# EAGLE board CT_schematic (EAGLE 7.6.0)

Size 100 x 80 mm. Coordinates in mm from the lower left corner, seen from the top.
Outline: 0,0 100,0 100,80 0,80 0,0
Copper layers (1*16): Top 0.035mm / dielectric 1.5mm / Bottom 0.035mm
Design rules "default": minimum track width 10mil, minimum drill 24mil, track to track 8mil, track to pad 8mil, pad to pad 8mil, via to via 8mil, smd to smd 8mil, copper to edge 40mil, drill to drill 8mil, minimum pad ring 10mil, minimum via ring 8mil, stop-mask expansion 4mil, vias tented up to drill 0mil, thermal gap 10mil

## Footprints (pad centres in the part's own frame; a part is rotated, then mirrored left to right if it is on the bottom)
C0603 = smd 0.8 x 0.8: 1 -0.762,0; 2 0.762,0
C0402 = smd 0.5 x 0.5: 1 -0.508,0; 2 0.508,0
C0805 = smd 1.2 x 1.3: 1 -1.016,0; 2 1.016,0
C1210 = smd 1.2 x 2.5: 1 -1.524,0; 2 1.524,0
C1206 = smd 1.3 x 1.6: 1 -1.524,0; 2 1.524,0
L0603 = smd 0.8 x 0.8: 1 -0.762,0; 2 0.762,0
L1210 = smd 1.2 x 2.5: 1 -1.524,0; 2 1.524,0
DR1040 = smd 1.6 x 3.2: 1 -4.458,0; 2 4.458,0
R0603 = smd 0.8 x 0.8: 1 -0.762,0; 2 0.762,0
LQFP64 = smd 0.3 x 1.2: 1 -3.75,-5.75; 2 -3.25,-5.75; 3 -2.75,-5.75; 4 -2.25,-5.75; 5 -1.75,-5.75; 6 -1.25,-5.75; 7 -0.75,-5.75; 8 -0.25,-5.75; 9 0.25,-5.75; 10 0.75,-5.75; 11 1.25,-5.75; 12 1.75,-5.75; 13 2.25,-5.75; 14 2.75,-5.75; 15 3.25,-5.75; 16 3.75,-5.75; 33 3.75,5.75; 34 3.25,5.75; 35 2.75,5.75; 36 2.25,5.75; 37 1.75,5.75; 38 1.25,5.75; 39 0.75,5.75; 40 0.25,5.75; 41 -0.25,5.75; 42 -0.75,5.75; 43 -1.25,5.75; 44 -1.75,5.75; 45 -2.25,5.75; 46 -2.75,5.75; 47 -3.25,5.75; 48 -3.75,5.75 | smd 1.2 x 0.3: 17 5.75,-3.75; 18 5.75,-3.25; 19 5.75,-2.75; 20 5.75,-2.25; 21 5.75,-1.75; 22 5.75,-1.25; 23 5.75,-0.75; 24 5.75,-0.25; 25 5.75,0.25; 26 5.75,0.75; 27 5.75,1.25; 28 5.75,1.75; 29 5.75,2.25; 30 5.75,2.75; 31 5.75,3.25; 32 5.75,3.75; 49 -5.75,3.75; 50 -5.75,3.25; 51 -5.75,2.75; 52 -5.75,2.25; 53 -5.75,1.75; 54 -5.75,1.25; 55 -5.75,0.75; 56 -5.75,0.25; 57 -5.75,-0.25; 58 -5.75,-0.75; 59 -5.75,-1.25; 60 -5.75,-1.75; 61 -5.75,-2.25; 62 -5.75,-2.75; 63 -5.75,-3.25; 64 -5.75,-3.75
LGA-16 = smd 1.5 x 0.4: 1 -2.1,0.975; 2 -2.1,0.325; 3 -2.1,-0.325; 4 -2.1,-0.975; 9 2.1,-0.975; 10 2.1,-0.325; 11 2.1,0.325; 12 2.1,0.975 | smd 0.4 x 1.5: 5 -0.975,-2.1; 6 -0.325,-2.1; 7 0.325,-2.1; 8 0.975,-2.1; 13 0.975,2.1; 14 0.325,2.1; 15 -0.325,2.1; 16 -0.975,2.1
SSOP-16 = smd 1.981 x 0.356: 1 -2.464,2.223; 2 -2.464,1.587; 3 -2.464,0.953; 4 -2.464,0.318; 5 -2.464,-0.318; 6 -2.464,-0.953; 7 -2.464,-1.587; 8 -2.464,-2.223; 9 2.464,-2.223; 10 2.464,-1.587; 11 2.464,-0.953; 12 2.464,-0.318; 13 2.464,0.318; 14 2.464,0.953; 15 2.464,1.587; 16 2.464,2.223
182-009-MALE = drill 1.194 pad 1.524 octagon: 1 -5.537,10.923; 2 -2.769,10.923; 3 0,10.923; 4 2.769,10.923; 5 5.537,10.923; 6 -4.153,8.08; 7 -1.384,8.08; 8 1.384,8.08; 9 4.153,8.08 | hole 3.048: -12.446,9.501; 12.446,9.501
ASEK = smd 1.4 x 1: 1 -1.1,-0.8; 2 1.1,-0.8; 3 1.1,0.8; 4 -1.1,0.8
ASDMB-XX.XXXXMHZ-XX-XX-XXX = smd 0.65 x 0.85: 1 0.45,0.2; 2 2.05,0.2; 3 2.05,1.8; 4 0.45,1.8
TSOT-23-5 = smd 1.3 x 0.62: 1 -1.31,0.95; 2 -1.31,0; 3 -1.31,-0.95; 4 1.31,-0.95; 5 1.31,0.95
WSON-8 = smd 0.3 x 0.6: 1 -0.75,0; 2 0.05,0; 3 0.85,0; 4 1.65,0; 5 1.65,3.8; 6 0.85,3.8; 7 0.05,3.8; 8 -0.75,3.8 | smd 3 x 2.6: PAD 0.45,1.9
DFN8_2X3MC = smd 0.813 x 0.305: 1 -1.398,0.75; 2 -1.398,0.25; 3 -1.398,-0.25; 4 -1.398,-0.75; 5 1.398,-0.75; 6 1.398,-0.25; 7 1.398,0.25; 8 1.398,0.75 | smd 1.753 x 1.549: 9 0,0
JST-2-SMD = smd 1 x 4.6: 1 -1,-3.7; 2 1,-3.7 | smd 1.6 x 3.4: NC1 -3.4,1.5; NC2 3.4,1.5
FCI_10118193-0001LF = smd 0.4 x 1.35: 1 -1.3,2.675; 2 -0.65,2.675; 3 0,2.675; 4 0.65,2.675; 5 1.3,2.675 | smd 1.6 x 1.4: 6 -3.2,2.45; 7 3.2,2.45 | smd 1.9 x 1.9: 8 -1.2,0; 9 1.2,0 | hole 0.5: -3.3,0; 3.3,0
SON-6 = smd 0.55 x 0.3: 1 -0.355,0.5 | smd 0.52 x 0.3: 2 -0.37,0; 3 -0.37,-0.5; 4 0.37,-0.5; 5 0.37,0; 6 0.37,0.5
SW_4-1437565-2 = smd 1.4 x 2.1: 1 -2.23,4.55; 2 -2.23,-4.55; 3 2.23,4.55; 4 2.23,-4.55
LGM67K-G1J2-24-Z = smd 0.8 x 1.4: A -2,0; C 0,0
NC7SZ125M5X = smd 1.3 x 0.7: 1 -1.3,0.95; 2 -1.3,0; 3 -1.3,-0.95; 4 1.3,-0.95; 5 1.3,0.95

## Placement (x,y rotation side)
C1  1e-06  [C0603]  -30.48,68.58 0 top  (outside the outline)
C2  1e-07  [C0603]  -34.29,68.58 0 top  (outside the outline)
C3  1e-07  [C0603]  -38.1,68.58 0 top  (outside the outline)
C4  1e-07  [C0603]  -41.91,68.58 0 top  (outside the outline)
C5  1e-07  [C0603]  -45.72,68.58 0 top  (outside the outline)
C6  1e-07  [C0603]  -49.53,68.58 0 top  (outside the outline)
C7  4.7e-06  [C0603]  -19.05,68.58 0 top  (outside the outline)
C8  1e-08  [C0603]  -53.34,68.58 0 top  (outside the outline)
C9  1e-06  [C0603]  -57.15,68.58 0 top  (outside the outline)
C10  1e-08  [C0402]  -34.29,73.66 0 top  (outside the outline)
C11  1e-08  [C0402]  -38.1,73.66 0 top  (outside the outline)
C12  1e-08  [C0402]  -41.91,73.66 0 top  (outside the outline)
C13  4.7e-07  [C0603]  -22.86,68.58 0 top  (outside the outline)
C14  1e-06  [C0603]  -60.96,68.58 0 top  (outside the outline)
C15  1e-06  [C0603]  -64.77,68.58 0 top  (outside the outline)
C16  2.2e-07  [C0603]  -26.67,68.58 0 top  (outside the outline)
C17  1e-06  [C0603]  -68.58,68.58 0 top  (outside the outline)
C18  1e-06  [C0603]  -72.39,68.58 0 top  (outside the outline)
C19  1e-08  [C0402]  -45.72,73.66 0 top  (outside the outline)
C20  1e-08  [C0402]  -49.53,73.66 0 top  (outside the outline)
C21  1e-05  [C0805]  -40.64,57.15 0 top  (outside the outline)
C22  1e-05  [C0805]  -45.72,57.15 0 top  (outside the outline)
C23  1e-06  [C0603]  -15.24,73.66 0 top  (outside the outline)
C24  1e-05  [C1210]  -68.58,49.53 0 top  (outside the outline)
C25  1e-07  [C0402]  -53.34,73.66 0 top  (outside the outline)
C26  1e-05  [C1206]  -22.86,58.42 0 top  (outside the outline)
C27  1e-05  [C1206]  -29.21,58.42 0 top  (outside the outline)
C28  1e-08  [C0402]  -57.15,73.66 0 top  (outside the outline)
F1  240.0  [L0603]  -19.05,73.66 0 top  (outside the outline)
I1  1e-05  [L1210]  -16.51,58.42 0 top  (outside the outline)
I2  5.2e-06  [DR1040]  -55.88,27.94 0 top  (outside the outline)
R2  1000.0  [R0603]  -22.86,73.66 0 top  (outside the outline)
R4  4700.0  [R0603]  -26.67,73.66 0 top  (outside the outline)
R5  10000.0  [R0603]  -35.56,63.5 0 top  (outside the outline)
R6  10000.0  [R0603]  -40.64,63.5 0 top  (outside the outline)
R7  10000.0  [R0603]  -45.72,63.5 0 top  (outside the outline)
R8  10000.0  [R0603]  -50.8,63.5 0 top  (outside the outline)
R9  100000.0  [R0603]  -63.5,57.15 0 top  (outside the outline)
R10  490000.0  [R0603]  -68.58,57.15 0 top  (outside the outline)
R11  1000000.0  [R0603]  -58.42,57.15 0 top  (outside the outline)
R12  100000.0  [R0603]  -15.24,63.5 0 top  (outside the outline)
R13  91000.0  [R0603]  -55.88,63.5 0 top  (outside the outline)
R14  100000.0  [R0603]  -20.32,63.5 0 top  (outside the outline)
R15  10000.0  [R0603]  -60.96,63.5 0 top  (outside the outline)
R16  10000.0  [R0603]  -66.04,63.5 0 top  (outside the outline)
R17  82000.0  [R0603]  -71.12,63.5 0 top  (outside the outline)
R18  300000.0  [R0603]  -25.4,63.5 0 top  (outside the outline)
R19  120000.0  [R0603]  -30.48,63.5 0 top  (outside the outline)
R20  2000.0  [R0603]  -30.48,73.66 0 top  (outside the outline)
R21  10000.0  [R0603]  -15.24,68.58 0 top  (outside the outline)
U1  STM32F378RCT6  [LQFP64]  -24.13,29.21 0 top  (outside the outline)
U2  l3g4200d  [LGA-16]  -49.53,49.53 0 top  (outside the outline)
U3  LTC2804CGN-1#PBF  [SSOP-16]  -44.45,40.64 0 top  (outside the outline)
U4  182-009-113R531  [182-009-MALE]  -41.91,6.35 0 top  (outside the outline)
U5  ASEK-2-32.768KHz-ECST  [ASEK]  -43.18,50.8 0 top  (outside the outline)
U6  ASDMB-25.000MHZ-EC-T  [ASDMB-XX.XXXXMHZ-XX-XX-XXX]  -16.51,1.27 0 top  (outside the outline)
U7  ltc3406es5  [TSOT-23-5]  -50.8,57.15 0 top  (outside the outline)
U8  LP2951ACSDX/NOPB  [WSON-8]  -64.77,39.37 0 top  (outside the outline)
U9  MCP73831T-2ACI/MC  [DFN8_2X3MC]  -66.04,72.39 0 top  (outside the outline)
U10  S2B-PH-SM4-TB(LF)(SN)  [JST-2-SMD]  -22.86,41.91 0 top  (outside the outline)
U11  10118193-0001LF  [FCI_10118193-0001LF]  -19.05,49.53 0 top  (outside the outline)
U12  TPS3895ADRYR  [SON-6]  -59.69,72.39 0 top  (outside the outline)
U13  4-1437565-2  [SW_4-1437565-2]  -45.72,27.94 0 top  (outside the outline)
U14  Q65110A2395  [LGM67K-G1J2-24-Z]  -57.15,49.53 0 top  (outside the outline)
U15  nc7sz125m5x  [NC7SZ125M5X]  -34.29,57.15 0 top  (outside the outline)

## Library data of the parts
C1-C28 F1 I1 I2 R2 R4-R21 U1-U15 = circuit_tree

## Nets
CLK_U1_3: U1.3 U5.3
CLK_U1_5: U1.5 U6.3
GND: C1.2 C2.2 C3.2 C4.2 C5.2 C6.2 C7.2 C8.2 C9.2 C10.2 C11.2 C12.2 C14.2 C15.2 C17.2 C18.2 C19.2 C20.2 C21.2 C22.1 C22.2 C23.2 C24.2 C25.2 C26.2 C27.2 C28.2 R2.2 R5.2 R6.2 R7.1 R7.2 R10.2 R14.2 R17.2 R19.2 R20.2 U1.12 U1.31 U1.63 U2.8 U2.9 U2.10 U2.11 U2.12 U2.13 U3.8 U4.5 U5.2 U6.2 U7.2 U8.3 U8.4 U8.PAD U9.6 U9.9 U10.2 U11.5 U11.6 U11.7 U11.8 U11.9 U12.2 U14.C U15.1 U15.3
INPUT_USBPOWER_5V: C26.1 R21.2 U9.1 U9.2 U11.1
NET_U1_7: R4.1 U1.7 U15.4
NET_U1_13: C8.1 C9.1 F1.1 U1.13 U1.17 U1.32
NET_U1_28: R6.1 U1.28
NET_U1_32: U1.32
NET_U1_33: U1.33
NET_U1_60: R5.1 U1.60
NET_U1_61: U14.A
NET_U1_62: U13.3 U13.4
NET_U2_14: C12.1 C13.1 U2.14
NET_U2_ATNET_1: C13.2
NET_U3_6: C14.1 U3.6
NET_U3_7: C16.1 I1.2 U3.7
NET_U3_9: C15.1 U3.9
NET_U3_10: C16.2 U3.10
NET_U3_11: R9.1 U3.11
NET_U4_2: U3.1 U4.2
NET_U4_3: U3.3 U4.3
NET_U4_7: U3.2 U4.7
NET_U4_8: U3.4 U4.8
NET_U7_1: U7.1
NET_U7_3: I2.1 U7.3
NET_U7_5: R10.1 R11.1 U7.5
NET_U7_ATNET_3: I2.2 R11.2
NET_U8_5: R12.1 U8.5
NET_U8_7: R13.2 R14.1 U8.7
NET_U9_5: R21.1 U9.5
NET_U9_8: R20.1 U9.8
NET_U12_1: R16.1 R17.1 U12.1
NET_U12_3: R18.2 R19.1 U12.3
NET_U12_4: R15.1 U12.4 U15.2
NET_U13_1: R2.1 U13.1 U13.2
PROC_SPI1_MISO: U1.22 U2.4
PROC_SPI1_MOSI: U1.23 U2.3
PROC_SPI1_NSS: R8.1 U1.20 U2.5
PROC_SPI1_SCK: U1.21 U2.2
PROC_USART1_CTS: U1.44 U3.13
PROC_USART1_RTS: U1.45 U3.15
PROC_USART1_RX: U1.25 U3.16
PROC_USART1_TX: U1.24 U3.14
VCC_S1_3V7: C21.1 C23.1 C27.1 U7.4 U8.8 U9.3 U9.4 U10.1
VCC_TIER1_1V8: C1.1 C2.1 C3.1 C4.1 C5.1 C6.1 C7.1 C11.1 C17.1 C18.1 C19.1 C20.1 C22.2 C25.1 C28.1 F1.2 I1.1 I2.2 R4.2 R8.2 R9.2 R11.2 R15.2 R16.2 R18.1 U1.1 U1.19 U1.64 U2.1 U3.5 U3.12 U5.4 U6.4 U12.6 U15.5
VCC_TIER1_2V5: C10.1 C24.1 R12.2 R13.1 U2.15 U2.16 U8.1

## Tracks (layer width: path | path; a pad name or v marks a point on that pad's centre or on a via)
CLK_U1_3  (1 unrouted)
CLK_U1_5  (1 unrouted)
GND  (65 unrouted)
INPUT_USBPOWER_5V  (4 unrouted)
NET_U1_7  (2 unrouted)
NET_U1_13  (5 unrouted)
NET_U1_28  (1 unrouted)
NET_U1_60  (1 unrouted)
NET_U1_62  (1 unrouted)
NET_U2_14  (2 unrouted)
NET_U3_6  (1 unrouted)
NET_U3_7  (2 unrouted)
NET_U3_9  (1 unrouted)
NET_U3_10  (1 unrouted)
NET_U3_11  (1 unrouted)
NET_U4_2  (1 unrouted)
NET_U4_3  (1 unrouted)
NET_U4_7  (1 unrouted)
NET_U4_8  (1 unrouted)
NET_U7_3  (1 unrouted)
NET_U7_5  (2 unrouted)
NET_U7_ATNET_3  (1 unrouted)
NET_U8_5  (1 unrouted)
NET_U8_7  (2 unrouted)
NET_U9_5  (1 unrouted)
NET_U9_8  (1 unrouted)
NET_U12_1  (2 unrouted)
NET_U12_3  (2 unrouted)
NET_U12_4  (2 unrouted)
NET_U13_1  (2 unrouted)
PROC_SPI1_MISO  (1 unrouted)
PROC_SPI1_MOSI  (1 unrouted)
PROC_SPI1_NSS  (2 unrouted)
PROC_SPI1_SCK  (1 unrouted)
PROC_USART1_CTS  (1 unrouted)
PROC_USART1_RTS  (1 unrouted)
PROC_USART1_RX  (1 unrouted)
PROC_USART1_TX  (1 unrouted)
VCC_S1_3V7  (7 unrouted)
VCC_TIER1_1V8  (34 unrouted)
VCC_TIER1_2V5  (6 unrouted)